# Altium PCB TRAY5.PcbDoc
Units mil, origin at the board's own origin, x right, y up, seen from the top; angles counter-clockwise.
Board outline 7360 x 1300 mil, 2 copper layers (Top Layer, Bottom Layer); 29 components, 25 nets, 124 pads, 71 vias.
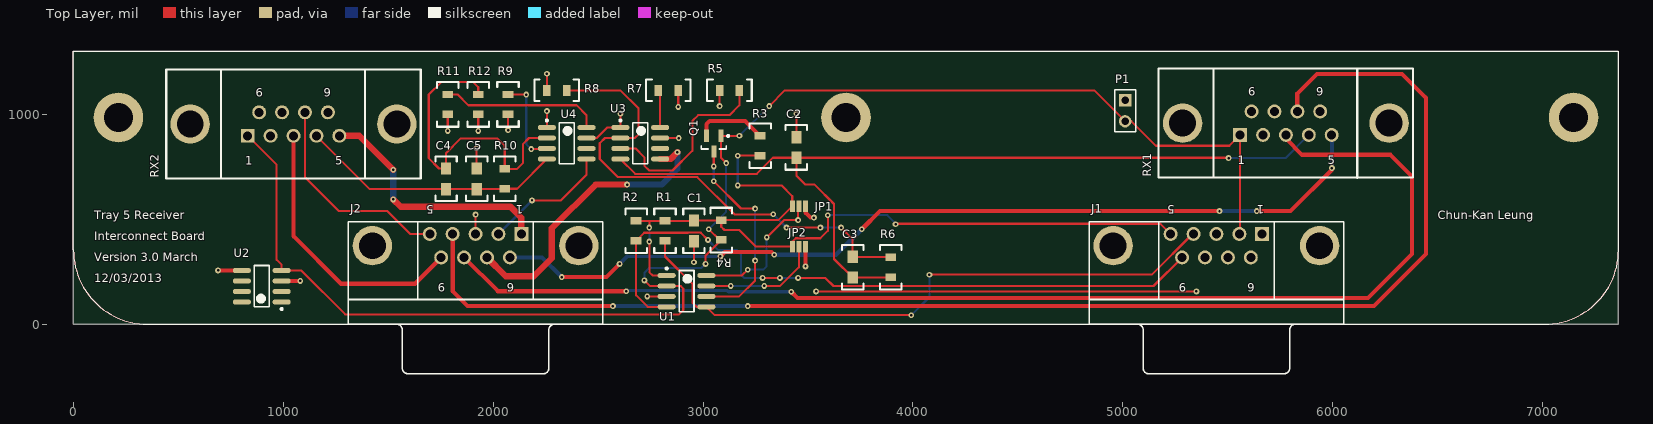
[diagram p0: Top Layer view]
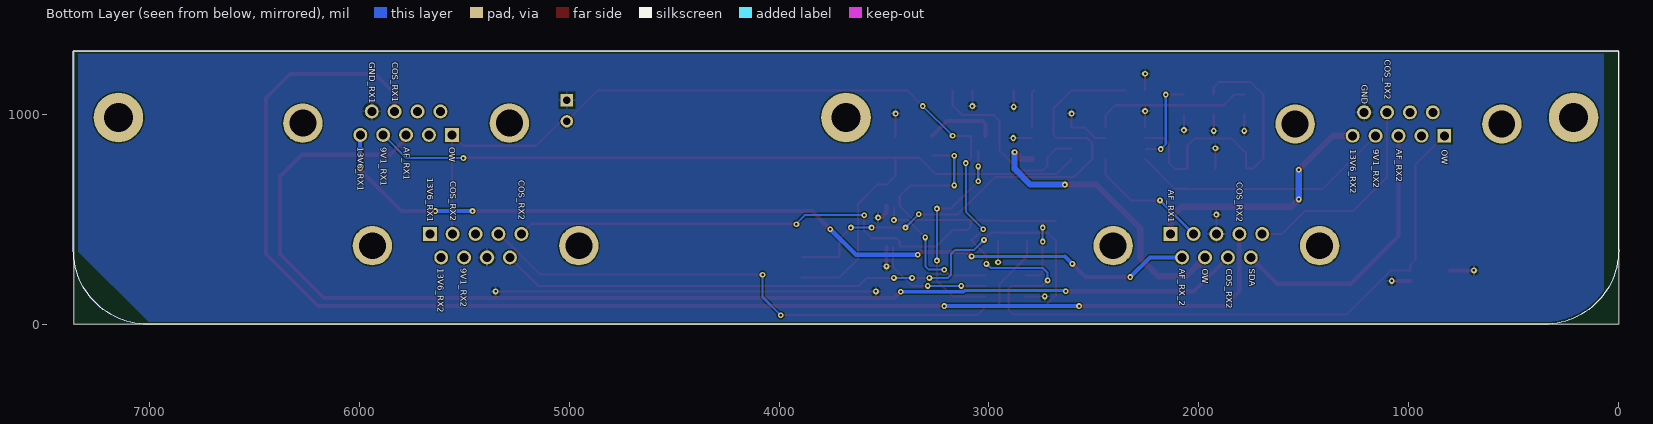
[diagram p1: Bottom Layer view, seen from below]

## Layer stack, top to bottom
Top Layer: signal copper 1.4
Dielectric: dielectric 12.6, FR-4, Dk 4.8
Bottom Layer: signal copper 1.4

## Board outline
0,0 0,1300 7360,1300 7360,0 0,0

## Design rules (kind name [scope] priority, off if disabled: settings)
Clearance [All] p1: gap=6
HoleSize [All] p1: absolutevalues=TRUE maxlimit=196.85 minlimit=11.81 maxpercent=80.000 minpercent=20.000
MinimumSolderMaskSliver [All] p1: minsoldermaskwidth=4
PolygonConnect [All] p1: connectstyle=Relief reliefconductorwidth=10 reliefentries=4 polygonreliefangle="90 Angle" airgapwidth=10
RoutingVias [All] p1: holewidth=15.75 width=23.62 viastyle="Through Hole" minholewidth=15.75 minwidth=23.62 maxholewidth=39.37 maxwidth=78.74
SilkToSolderMaskClearance SilkscreenOverComponentPads [IsPad] p1: minsilkscreentomaskgap=10 clearancetoexposedcopper=TRUE
SolderMaskExpansion [All] p1: expansion=3.94
Width [All] p1: maxlimit=50 minlimit=8 preferedwidth=20
25 further rules are at their usual default settings.

## Classes and differential pairs
component class Tray5: C2 C3 C4 C5 J1 J2 R5 R6 R7 R8 R9 R10 R11 R12 RX1 RX2 U3 U4
component class Designator: U2

## Components (designator, comment, footprint, x,y, rotation, side; value= is the part's Value field where it differs from the comment)
C1 "0805 Cap" "0805 Cap" 2956.69,444.88 r270 top
C2 "0805 Cap" "0805 Cap" 3444.88,842.52 r90 top
C3 "0805 Cap" "0805 Cap" 3712.6,271.65 r90 top
C4 "0805 Cap" "0805 Cap" 1775.59,692.91 r90 top
C5 "0805 Cap" "0805 Cap" 1921.26,692.91 r90 top
J1 "D Connector 9" DSUB1.385-2H9 5446.06,0 r180 top (schematic designator J2)
J2 "D Connector 9" DSUB1.385-2H9 1916.14,0 r180 top
JP1 "Jumper Select" SOLDER_JUMPER_3_A 3464.57,555.12 r180 top
JP2 "Jumper Select" SOLDER_JUMPER_3_A 3464.57,362.2 r180 top
P1 "Header 2" HDR1X2 5011,1067 r270 top
Q1 "DMP2004K" DMP2004KDITR-ND 3051.18,862.2 r270 top
R1 "0805 Resistor" "0805 Resistor" 2818.9,444.88 r270 top
R2 "0805 Resistor" "0805 Resistor" 2681.1,444.88 r270 top
R3 "0805 Resistor" "0805 Resistor" 3271.65,850.39 r90 top
R4 "0603 Resistor" "0805 Resistor" 3086.61,448.82 r270 top
R5 "0805 Resistor" "0805 Resistor" 3125.98,1114.17 r0 top
R6 "0805 Resistor" "0805 Resistor" 3893.7,271.65 r90 top
R7 "0805 Resistor" "0805 Resistor" 2834.65,1114.17 r0 top
R8 "0805 Resistor" "0805 Resistor" 2303.15,1114.17 r180 top
R9 "0805 Resistor" "0805 Resistor" 2070.87,1047.24 r90 top
R10 "0805 Resistor" "0805 Resistor" 2055.12,692.91 r90 top
R11 "0805 Resistor" "0805 Resistor" 1783.46,1047.24 r270 top
R12 "0805 Resistor" "0805 Resistor" 1929.13,1047.24 r270 top
RX1 "D Connector 9" "DSUB Upright" 5777,957.98 r180 top
RX2 "D Connector 9" "DSUB Upright" 1048.86,953.85 r180 top
U1 "DS24820Z+_ND" DS2482-100 2921.26,157.48 r0 top
U2 "TO-92" DS18S20 897.64,181.1 r180 top
U3 "LT1120A" "SOIC8 - LT1120A" 2700.79,862.2 r0 top
U4 "LT1120A" "SOIC8 - LT1120A" 2350.39,862.2 r0 top

## Footprints (in the part's own frame and the unit in brackets; to place one, negate y for a bottom-side part, rotate by r counter-clockwise, add the part's x,y. Pads: shape width x height; smd on the part's side, far side on the other; paste and mask are expansions set on the pad)
"0805 Cap" [mm] "0805 Capacitor"
  rect 1.5x1.25 smd: 1(1.25,0) 2(-1.25,0)
  silkscreen extent -2.7,-1.3 2.7,1.3, body extent -1,-0.63 1.1,0.63, height 0.9
"0805 Resistor" [mm] "0805 Resistor"
  rect 0.9x1.3 smd: 1(1.2,0) 2(-1.2,0)
  silkscreen extent -2.7,-1.3 2.7,1.3, body extent -1,-0.63 1.1,0.63, height 0.6
DMP2004KDITR-ND [mm] "SOT23, 3-Leads, Body 3.0x2.5mm (max), Pitch 0.89mm, IPC Medium Density"
  rect 1.5x0.6 smd: 1(-0.9,0.89) 2(-0.9,-0.89) 3(1,0)
  silkscreen extent -1.02,-1.5 0.7,1.87, body extent -0.7,-1.5 0.7,1.5, height 1.2
DS18S20 [mm] "SOIC, 8-Leads, Body 5.0x4.0mm (max), Pitch 1.27mm, IPC Medium Density"
  oval 2.2x0.6 smd: 1(-2.4,1.905) 2(-2.4,0.635) 3(-2.4,-0.635) 4(-2.4,-1.905) 5(2.4,-1.905) 6(2.4,-0.635) 7(2.4,0.635) 8(2.4,1.905)
  silkscreen extent -2.53,-2.5 0.9,2.88, body extent -2,-2.5 2,2.5, height 1.75
DS2482-100 [mm] "SOIC, 8-Leads, Body 5.0x4.0mm (max), Pitch 1.27mm, IPC Medium Density"
  oval 2.2x0.6 smd: 1(-2.4,1.905) 2(-2.4,0.635) 3(-2.4,-0.635) 4(-2.4,-1.905) 5(2.4,-1.905) 6(2.4,-0.635) 7(2.4,0.635) 8(2.4,1.905)
  silkscreen extent -2.52,-2.5 0.9,2.88, body extent -2,-2.5 2,2.5, height 1.75
DSUB1.385-2H9 [mm] "Connector; D Subminiature; 9 Position; Right Angle; Pitch 1.385 mm"
  rect 1.69x1.69 hole 1.09: 1(-5.54,-10.92)
  round 1.69 hole 1.09: 2(-2.77,-10.92) 3(0,-10.92) 4(2.77,-10.92) 5(5.54,-10.92) 6(-4.155,-8.08) 7(-1.385,-8.08) 8(1.385,-8.08) 9(4.155,-8.08)
  round 4.76 hole 3.26: 10(-12.495,-9.5) 11(12.495,-9.5)
  silkscreen extent -15.4,-12.4 15.4,6
"DSUB Upright" [mm] "171-009-213R911"
  rect 1.69x1.69 hole 1.09: 1(5.54,1.42)
  round 1.69 hole 1.09: 2(2.77,1.42) 3(0,1.42) 4(-2.77,1.42) 5(-5.54,1.42) 6(4.153,-1.42) 7(1.384,-1.42) 8(-1.384,-1.42) 9(-4.153,-1.42)
  round 4.76 hole 3.26: 10(12.5,0) 11(-12.5,0)
  silkscreen extent -15.4,-6.6 15.4,6.6
HDR1X2 [mm] "Connector; Header; 2 Position"
  rect 1.5x1.5 hole 0.9: 1(0,0)
  round 1.5 hole 0.9: 2(2.54,0)
  silkscreen extent -1.27,-1.27 3.81,1.27
"SOIC8 - LT1120A" [mm] "SOIC, 8-Leads, Body 5.0x4.0mm (max), Pitch 1.27mm, IPC Medium Density"
  oval 2.2x0.6 smd: 1(-2.4,1.905) 2(-2.4,0.635) 3(-2.4,-0.635) 4(-2.4,-1.905) 5(2.4,-1.905) 6(2.4,-0.635) 7(2.4,0.635) 8(2.4,1.905)
  silkscreen extent -2.52,-2.5 0.9,2.88, body extent -1.99,-2.5 1.99,2.5, height 1.75
SOLDER_JUMPER_3_A [mm]
  rect 0.6x1.4 smd: 1(1,-0.2) 2(0.2,-0.2) 3(-0.6,-0.2)

## Part data
C1: library part "0805 MLCC - X7R, 10%", "0805 MLCC - X7R, 10%"
C2 C3 C4 C5: library part "0805 MLCC - NP0, 5%", "0805 MLCC - NP0, 5%"
J1 J2 RX1 RX2: "Receptacle Assembly, 9 Position, Right Angle"
JP1 JP2: library part "Header 3", "Header, 3-Pin"
P1: "Header, 2-Pin"
Q1: "MOSFET P-CH 20V 600MA SOT23-3"
R1 R2 R3 R5 R6 R7 R8 R9 R10 R11 R12: library part "0805 Thick Film Resistor 1%", "0805 Thick Film Resistor 1%"
R4: library part "0603 Thick Film Resistor 1%", "0603 Thick Film Resistor 1%"
U2: library part DS18S20

## Free pads (board coordinates)
  round 236.22 hole 137.8: 0(214.57,985.04) 0(3681.1,985.04) 0(7147.64,985.04)

## Via types
v1: diameter 27.56, hole 11.81, Top Layer to Bottom Layer, 69 vias
v2: diameter 27.56, hole 11.81, Top Layer to Bottom Layer, tented both sides, 2 vias

## Nets (pads, with @x,y where several pads share a name; then routed paths per layer and width w, separated by ;. In a path a pad name is that pad's centre, name@x,y a point inside that pad or via, vN(x,y) a via of type N, cw(c..) or ccw(c..) an arc to the next point about the centre after c; other vN are vias at no path point)
3V3_TELEM_RX: C1.2 J1.5 JP1.1 JP2.1 R1.2 R2.2 R3.2 R4.2 U1.1 | length 4032.7
  Top Layer w10: R2.2 2744.09,492.13 ; v1(2744.09,393.7) 2744.09,248.43 2760.04,232.48 U1.1 ; v1(2744.09,460.63) 2744.09,492.13 ; C1.2@2954.72,492.13 R1.2 2744.09,492.13 ; C1.2 R4.2@3084.65,494.09 ; v1(3165.35,661.42) 3374.02,661.42 3425.2,610.24 JP1.1 3358.27,496.06 R4.2 3086.61,464.57 3102.36,448.82 3173.23,448.82 3251.97,370.08 JP2.1 3425.2,393.51 3441.14,409.45 3559.06,409.45 3594.49,444.88 v1(3594.49,519.68) ; v1(3165.35,803.15) R3.2 ; v1(3917.32,476.38) 3919.66,478.72 5179.16,478.72 J1.5
  Bottom Layer w10: v1(2744.09,393.7) v1(2744.09,460.63) ; v1@3165.35,669.29 v1(3165.35,803.15) ; v1(3594.49,519.68) 3877.95,519.68 v1@3913.39,484.25
8V0_RX1: C4.2 C5.2 R10.2 RX2.4 U4.4 | length 1262.7
  Top Layer w10: RX2.4 1412.16,643.7 C4.2 C5.2 2053.15,643.7 R10.2 2114.37,645.67 U4.4
8V0_RX2: C2.2 C3.2 R6.2 RX1.4 U3.4 | length 4269
  Top Layer w10: U3.4 2676.97,716.54 3255.91,716.54 3332.68,793.31 C2.2 ; R6.2@3891.73,222.44 C3.2 3624.02,311.02 3624.02,572.83 3531.5,665.35 3488.19,665.35 3444.88,708.66 C2.2 ; v1@5500,793.31 C2.2
  Bottom Layer w10: v1(5503.94,791.34) 5775.31,791.34 RX1.4
9V1_RX1: J2.2 U4.5 | length 611.4
  Top Layer w10: v1(2185.04,589.76) 2322.05,589.76 2444.88,712.6 U4.5
  Bottom Layer w10: J2.2 v1(2185.04,589.76)
9V1_RX2: J2.7 U3.5 | length 1414
  Top Layer w30: J2.7 2060.43,228.35 2192.91,228.35 2279.53,314.96 2279.53,456.69 2488.19,665.35 v1(2637.8,665.35) ; U3.5 2846.26,787.2 v1(2877.95,818.9)
  Bottom Layer w30: v1(2637.8,665.35) 2803.15,665.35 2877.95,740.16 v1(2877.95,818.9)
13V6_RX1: J2.1 RX2.5 | length 1189.6
  Top Layer w30: RX2.5 1361.9,897.94 v1(1523.62,736.22) ; v1(1523.62,594.49) 1559.06,559.06 2082.68,559.06 2134.25,507.48 J2.1
  Bottom Layer w30: v1(1523.62,594.49) v1(1523.62,736.22)
13V6_RX2: J2.6 RX1.5 | length 4342.4
  Top Layer w20: v1(2326.77,224.41) 2539.37,224.41 v1(2602.36,287.4) ; v1(3082.93,323.09) 3103.35,343.5 3326.29,343.5 v1(3338.83,330.96) ; v1(3755.91,452.76) 3842.52,539.37 v1(5460.63,539.37) ; v1(5637.8,539.37) 5799.21,539.37 5996.06,736.22 v1(5996.06,744.09)
  Bottom Layer w15: 2638.05,323.09 v1(3082.93,323.09)
  Bottom Layer w20: J2.6 2233.07,318.11 v1(2326.77,224.41) ; v1(2602.36,287.4) 2638.05,323.09 ; v1(3338.83,330.96) 3634.11,330.96 v1(3755.91,452.76) ; v1(5460.63,539.37) v1(5637.8,539.37) ; v1(5996.06,744.09) RX1.5@5996.06,901.13
AF_RX1: J2.9 RX2.3 | length 1327.8
  Top Layer w20: RX2.3 1048.86,419.65 1275.59,192.91 1627.36,192.91 J2.9
AF_RX2: J2.8 RX1.3 | length 5748.6
  Top Layer w20: J2.8 2022.24,157.48 v1(2633.86,157.48) ; v1(3420.13,154.67) 3449.8,125 6168.31,125 6377.95,334.65 6377.95,704.72 6275.59,807.09 5854.33,807.09 5777,884.42 RX1.3
  Bottom Layer w15: v1@2636.67,160.29 3115.34,160.29 3120.96,154.67 v1(3420.13,154.67)
  Bottom Layer w20: v1(2633.86,157.48) v1@2636.67,160.29
COS_RX1: J2.5 RX2.8 | length 1016.4
  Top Layer w10: RX2.8 1103.36,699.79 1263.78,539.37 1496.06,539.37 1605.51,429.92 J2.5
COS_RX2: J2.4 RX1.8 | length 6571.2
  Top Layer w20: J2.4 1807.09,157.48 1877.95,86.61 v1(2570.87,86.61) ; v1(3212.6,86.61) 6196.85,86.61 6444.88,334.65 6444.88,1078.74 6330.71,1192.91 5925.2,1192.91 5831.5,1099.22 RX1.8
  Bottom Layer w20: v1(2570.87,86.61) v1(3212.6,86.61)
GND: C1.1 C2.1 C5.1 J1.8 J2.3 JP1.3 JP2.3 P1.1 R5.2 R7.1 R8.1 R9.2 R11.1 R12.1 RX1.9 RX2.9 U1.3 U2.3 U2.5 U3.1 U3.7 U4.1 U4.7 | length 3556.5
  Top Layer w10: v1(1783.46,921.26) R11.1 ; J2.3 v1(1916.14,522.44) ; C5.1 v1(1921.26,838.58) ; v1(1929.13,921.26) R12.1 ; v1(2070.87,925.2) R9.2 ; U4.1 v1(2255.91,1015.75) ; R8.1 v1(2255.91,1192.91) ; U4.7 2493.5,887.2 2543.5,937.2 U3.1 v1(2606.3,1003.94) ; v1(2733.66,132.48) U1.3 ; U3.7 v1(2884.45,887.2) ; v1(2881.89,1035.43) R7.1 ; v1(2956.69,295.28) C1.1 ; v1(3078.74,1039.37) R5.2 ; C2.1 v1(3444.88,1003.94) ; v1(3538.81,156.07) v1(5350.82,156.07) ; P1.1 P1.1@5015.31,1062.69
  Top Layer w20: v1(689.17,256.1) U2.5 ; U2.3 v1(1081.3,206.1) ; v1(3488.19,275.59) JP2.3 ; JP1.3 3488.19,531.5 3511.81,507.87
  other v1: 3528.54,507.87
NetC3_1: C3.1 R6.1 R8.2 U3.2 | length 2404.9
  Top Layer w10: R8.2 2606.3,1114.17 2692.91,1027.56 2692.91,905.51 2674.61,887.2 U3.2 2532.87,887.2 2507.87,862.2 2507.87,787.4 2594.74,700.54 2972.69,700.54 3149.61,523.62 v1(3334.65,523.62) ; v1(3397.64,460.63) v1(3559.06,460.63) ; v1(3657.48,460.63) 3712.6,405.51 C3.1 R6.1@3891.73,320.87
  Bottom Layer w10: v1(3334.65,523.62) v1(3397.64,460.63) ; v1(3559.06,460.63) v1(3657.48,460.63)
NetC4_1: C4.1 R10.1 R12.2 U4.2 | length 1533.5
  Top Layer w10: R12.2 1929.13,1129.92 1905.51,1153.54 1751.97,1153.54 1692.91,1094.49 1692.91,791.34 1742.13,742.13 C4.1 1775.59,814.96 1846.46,885.83 2019.68,885.83 2055.12,850.39 R10.1 2114.17,740.16 2141.73,767.72 2141.73,858.27 2170.67,887.2 U4.2
NetJP1_2: JP1.2 U1.8 | length 689.9
  Top Layer w10: U1.8 3185.24,232.48 v1(3212.6,259.84) ; v1(3303.15,413.39) 3385.83,496.06 v1(3452.76,496.06) JP1.2@3452.76,559.06
  Bottom Layer w10: v1(3212.6,259.84) 3287.4,259.84 3303.15,275.59 v1(3303.15,413.39)
NetJP2_2: JP2.2 U1.7 | length 576.3
  Top Layer w10: U1.7 v1(3132.48,182.48) ; v2(3291.34,182.48) 3367.52,182.48 3456.69,271.65 JP2.2
  Bottom Layer w10: v1(3132.48,182.48) v2(3291.34,182.48)
NetQ1_2: Q1.2 R3.1 | length 346.7
  Top Layer w20: Q1.2 3016.14,953.15 3031.5,968.5 3200.79,968.5 R3.1
NetQ1_3: Q1.3 U1.6 | length 998.8
  Top Layer w10: U1.6 3171.85,132.48 3248.03,208.66 v1(3248.03,303.15) ; v1(3051.18,681.1) 3181.1,551.18 v1(3248.03,551.18) ; v1(3051.18,751.97) Q1.3
  Bottom Layer w10: v1(3051.18,681.1) v1(3051.18,751.97) ; v1(3248.03,303.15) v1(3248.03,551.18)
NetR5_1: R5.1 U3.3 | length 916
  Top Layer w10: U3.3 2678.54,837.2 2720.47,795.28 2720.47,755.91 2743.84,732.54 2854.58,732.54 2948.82,826.77 2948.82,968.5 2976.38,996.06 3125.98,996.06 3173.23,1043.31 R5.1
NetR7_2: R7.2 U3.8 | length 180.2
  Top Layer w10: R7.2 2795.28,1106.3 U3.8
NetR9_1: R9.1 U4.3 | length 428.5
  Top Layer w10: R9.1 v1(2157.48,1094.49) ; v1(2181.1,834.65) U4.3@2253.35,834.65
  Bottom Layer w10: v1(2157.48,1094.49) 2157.48,858.27 v1(2181.1,834.65)
NetR11_2: R11.2 U4.8 | length 761
  Top Layer w10: R11.2 1830.71,1094.49 1881.89,1043.31 2397.64,1043.31 2444.88,996.06 U4.8
ONEWIRE: J1.2 P1.2 Q1.1 R4.1 RX1.1 RX2.1 U1.2 U2.4 | length 7238.5
  Top Layer w10: RX2.1 968.5,760.19 968.5,307.09 992.13,283.46 U2.4 1086.42,256.1 1295.28,47.24 2885.83,47.24 2905.51,66.93 2905.51,169.29 2892.32,182.48 U1.2 2746.65,182.48 v1(2720.47,208.66) ; v1(3011.81,287.4) 3011.81,326.77 R4.1 ; v1(3027.56,452.76) R4.1@3078.74,401.57 ; v1(3110.24,767.72) 3086.22,791.73 Q1.1 v1(3173.23,897.64) ; v1(3314.96,1039.37) 3389.76,1114.17 4863.83,1114.17 P1.2 5040.87,967 5157.48,850.39 5507.2,850.39 RX1.1 5558.89,433.69 J1.2
  Bottom Layer w10: v1(2720.47,208.66) 2720.47,244.09 2744.09,267.72 2992.13,267.72 v1(3011.81,287.4) ; v1(3027.56,452.76) 3110.24,535.43 v1(3110.24,767.72) ; v1(3173.23,897.64) v1(3314.96,1039.37)
SCL_TELEM_RX: J1.9 R2.1 U1.4 | length 3265.1
  Top Layer w10: U1.4 2736.42,82.48 2681.1,137.8 R2.1 2719.49,436.02 2719.66,435.85 2927.18,435.85 2927.53,436.2 2989,436.2 ; 2989.17,436.02 v1(3023.62,401.57) ; v2(3283.46,220.47) v1(3366.14,220.47) ; v1(3452.76,220.47) 3582.68,220.47 3621.24,181.91 5146.28,181.91 J1.9
  Bottom Layer w10: v1(3023.62,401.57) 3070.87,354.33 3161.42,354.33 3181.1,334.65 3181.1,236.22 3196.85,220.47 v2(3283.46,220.47) ; v1(3366.14,220.47) v1(3452.76,220.47)
SDA_TELEM_RX: J1.4 R1.1 U1.5 | length 2984.2
  Top Layer w10: R1.1 2818.9,322.83 2948.82,192.91 2948.82,102.36 2968.7,82.48 U1.5 3054.92,43.31 v1(3992.13,43.31) ; v1(4078.74,236.22) 5137.99,236.22 5331.69,429.92 J1.4
  Bottom Layer w10: v1(3992.13,43.31) 4078.74,129.92 v1(4078.74,236.22)
pads on no net: J1.1 J1.3 J1.6 J1.7 J1.10 J1.11 J2.10 J2.11 RX1.2 RX1.6 RX1.7 RX1.10 RX1.11 RX2.2 RX2.6 RX2.7 RX2.10 RX2.11 U2.1 U2.2 U2.6 U2.7 U2.8 U3.6 U4.6
copper on no net: | length 34040.5
  Top Layer w1: 0,354.33 ccw(c354.33,354.33) 354.33,0 7007.87,0 ccw(c7007.87,354.33) 7362.2,354.33 7362.2,1300 0,1300 0,354.33
  Bottom Layer w1: 0,354.33 ccw(c354.33,354.33) 354.33,0 7007.87,0 ccw(c7007.87,354.33) 7362.2,354.33 7362.2,1300 0,1300 0,354.33

## Polygon pours and split planes (outlines as drawn)
GND on Bottom Layer "Bottom Layer-No Net" (solid, pour order 6): 70,1295 70,153 216,7 534,7 6999,7 7013,21 7338,346 7338,360 7338,1281 7345,1288 70,1288

## Silkscreen, mask and mechanical layers (free items; w line width, h text height)
Top Overlay:
  lines w1: 0,354.33 ccw(c354.33,354.33) 354.33,0 7007.87,0 ccw(c7007.87,354.33) 7362.2,354.33 7362.2,1300 0,1300 0,354.33
  text "Tray 5 Receiver" at 100,500 h39.37
  text "Chun-Kan Leung" at 6500,500 h39.37
  text "Interconnect Board" at 100,400 h39.37
  text "Version 3.0 March" at 100,300 h39.37
  text "12/03/2013" at 100,200 h39.37
Bottom Overlay:
  lines w1: 0,354.33 ccw(c354.33,354.33) 354.33,0 7007.87,0 ccw(c7007.87,354.33) 7362.2,354.33 7362.2,1300 0,1300 0,354.33
  text "COS_RX2" at 1114.17,1259.84 h29.37 r90
  text "COS_RX1" at 5842.52,1248.03 h29.37 r90
  text "GND_RX1" at 5952.76,1248.03 h29.37 r90
  text "GND" at 1224.41,1141.73 h29.37 r90
  text "13V6_RX1" at 6007.87,846.46 h29.37 r90
  text "OW" at 5570.87,842.52 h29.37 r90
  text "AF_RX1" at 5787.4,842.52 h29.37 r90
  text "9V1_RX1" at 5897.64,842.52 h29.37 r90
  text "AF_RX2" at 1059.06,834.65 h29.37 r90
  text "9V1_RX2" at 1169.29,834.65 h29.37 r90
  text "13V6_RX2" at 1279.53,834.65 h29.37 r90
  text "OW" at 842.52,830.71 h29.37 r90
  text "13V6_RX1" at 5677.17,696.85 h29.37 r90
  text "COS_RX2" at 5240.16,685.04 h29.37 r90
  text "COS_RX2" at 5566.93,681.1 h29.37 r90
  text "COS_RX2" at 1818.9,677.17 h29.37 r90
  text "AF_RX1" at 2145.67,641.73 h29.37 r90
  text "9V1_RX2" at 5515.75,267.72 h29.37 r90
  text "13V6_RX2" at 5625.98,267.72 h29.37 r90
  text "SDA" at 1759.84,263.78 h29.37 r90
  text "COS_RX2" at 1870.08,263.78 h29.37 r90
  text "OW" at 1984.25,263.78 h29.37 r90
  text "AF_RX_2" at 2094.49,263.78 h29.37 r90
Top Solder:
  lines w1: 0,354.33 ccw(c354.33,354.33) 354.33,0 7007.87,0 ccw(c7007.87,354.33) 7362.2,354.33 7362.2,1300 0,1300 0,354.33
Bottom Solder:
  lines w1: 0,354.33 ccw(c354.33,354.33) 354.33,0 7007.87,0 ccw(c7007.87,354.33) 7362.2,354.33 7362.2,1300 0,1300 0,354.33

## Text inside footprints (layer, text, board x,y; h text height)
J1: Top Overlay "1" at 5674.02,565.94 h39.37 r180; Top Overlay "5" at 5247.64,565.94 h39.37 r180; Top Overlay "9" at 5302.17,195.87 h39.37 r180; Top Overlay "6" at 5629.33,195.87 h39.37 r180
J2: Top Overlay "1" at 2144.09,565.94 h39.37 r180; Top Overlay "5" at 1717.72,565.94 h39.37 r180; Top Overlay "9" at 1772.24,195.87 h39.37 r180; Top Overlay "6" at 2099.41,195.87 h39.37 r180
RX1: Top Overlay "9" at 5922,1087.98 h39.37; Top Overlay "6" at 5597,1087.98 h39.37; Top Overlay "5" at 5977,762.98 h39.37; Top Overlay "1" at 5547,762.98 h39.37
RX2: Top Overlay "9" at 1193.86,1083.85 h39.37; Top Overlay "6" at 868.86,1083.85 h39.37; Top Overlay "5" at 1248.86,758.85 h39.37; Top Overlay "1" at 818.86,758.85 h39.37